# Altium PCB Arduino_DIY.PcbDoc
Units mm, origin at the board's own origin, x right, y up, seen from the top; angles counter-clockwise.
Board outline 80 x 47.5 mm, 2 copper layers (Top Layer, Bottom Layer), stack 1.1 mm thick; 35 components, 34 nets, 157 pads, 2 vias.
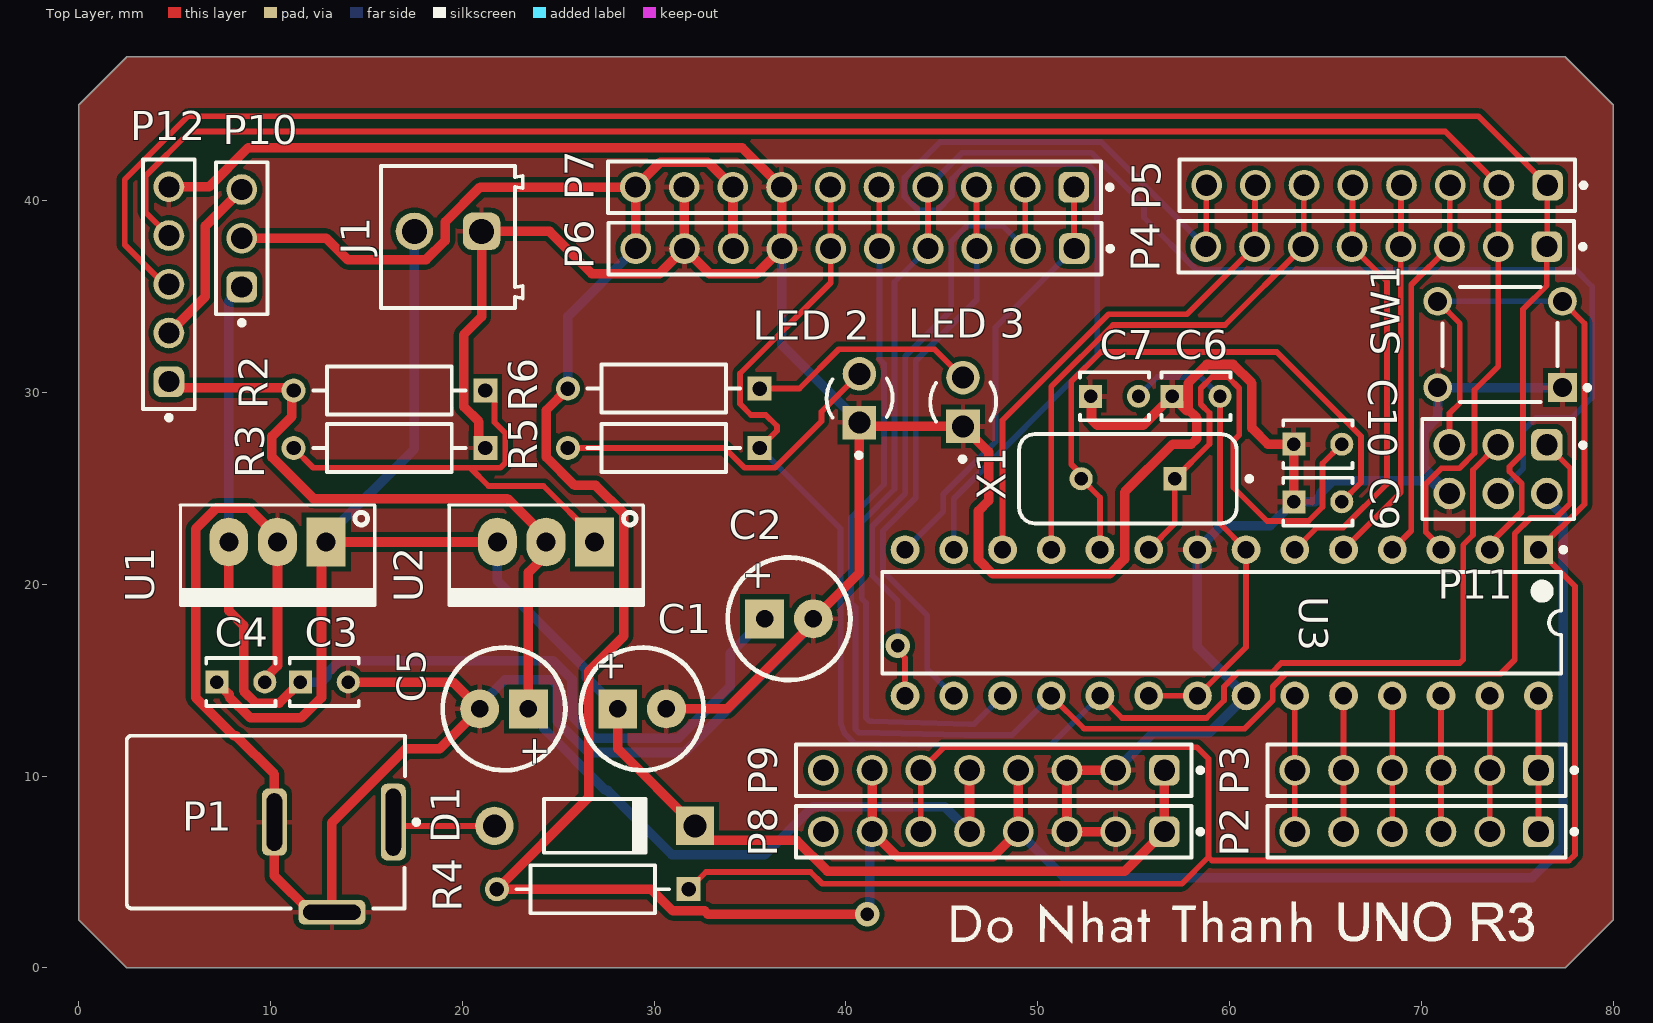
[diagram p0: Top Layer view]
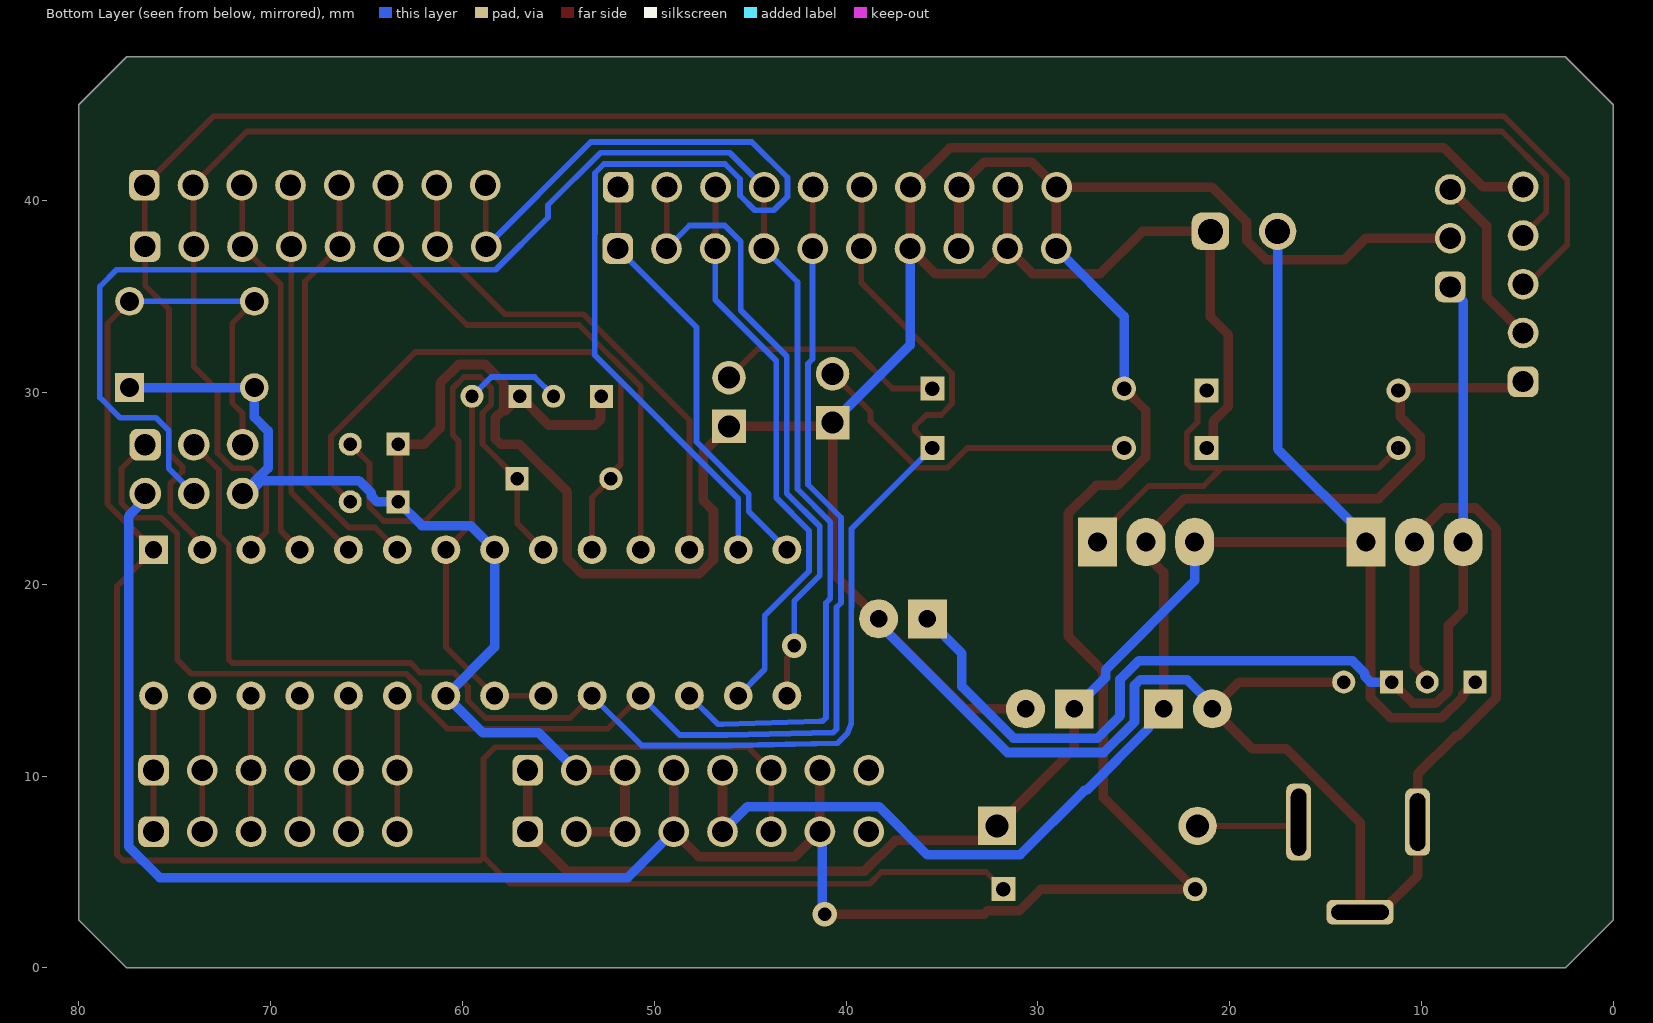
[diagram p1: Bottom Layer view, seen from below]
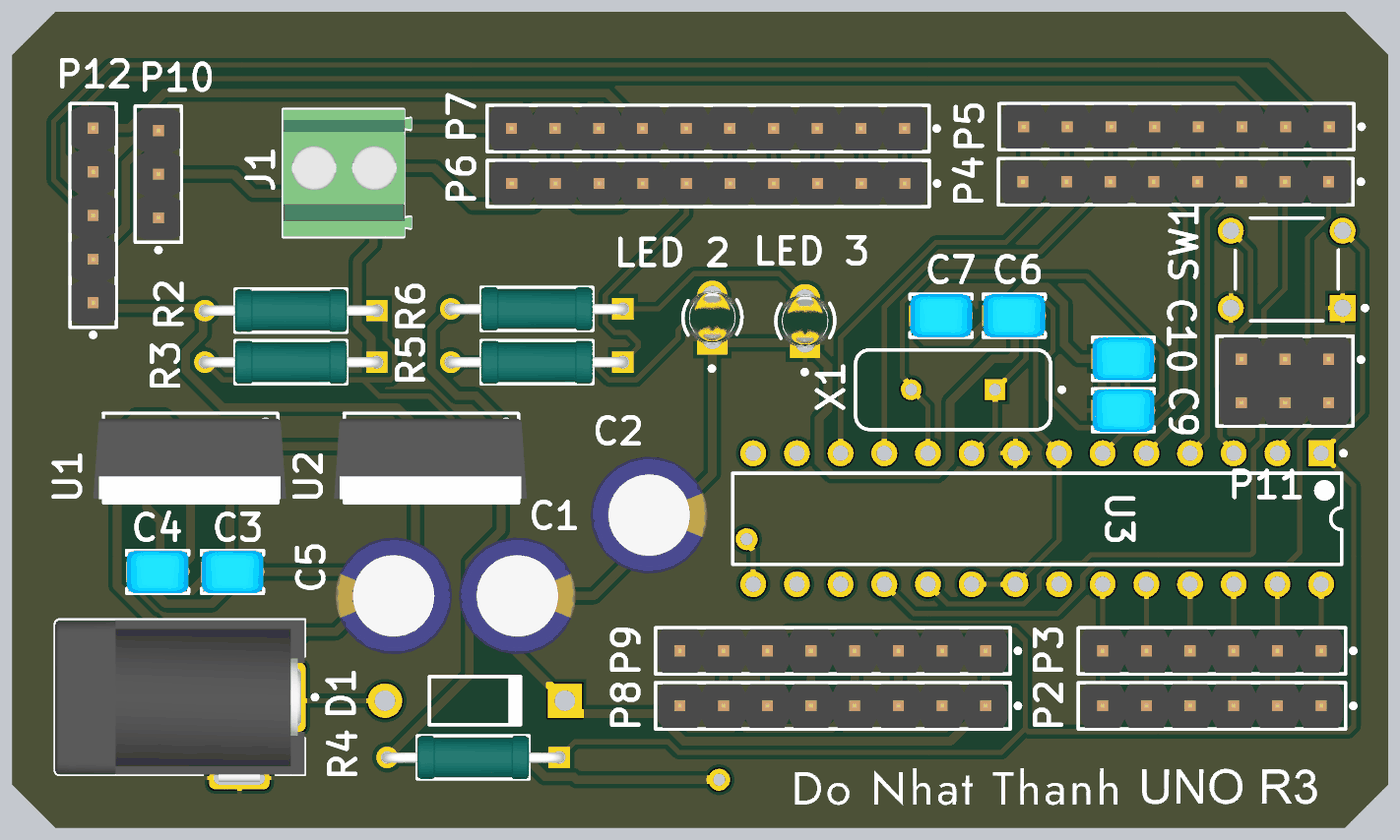
[diagram p2: 3D render of the assembled board from above, using the file's embedded part models]

## Layer stack, top to bottom
Top Solder: solder mask 0.05, Solder Resist, Dk 3.5
Top Layer: signal copper 0.1
Dielectric 1: dielectric 0.9, FR-4, Dk 4.8
Bottom Layer: signal copper 0.1
Bottom Solder: solder mask 0.05, Solder Resist, Dk 3.5

## Board outline
0,45 0,2.5 2.5,0 77.5,0 80,2.5 80,45 77.5,47.5 2.5,47.5

## Design rules (kind name [scope] priority, off if disabled: settings)
Clearance [All] p1: gap=0.254 ignorepadtopadclearanceinfootprint=FALSE except(0: Arc-Hole Track-Hole SMDPad-Hole THPad-Hole Via-Hole Fill-Hole Poly-Hole Region-Hole Text-Hole)
HoleSize [All] p1: absolutevalues=TRUE maxlimit=3.5 minlimit=0.025 maxpercent=80.000 minpercent=20.000
PolygonConnect [All] p1: connectstyle=Relief reliefconductorwidth=0.254 reliefentries=4 polygonreliefangle="90 Angle" airgapwidth=0.254
RoomDefinition Arduino_DIY [InComponentClass('Arduino_DIY')] p1: confinementstyle=ConfineOut formatcopy=TRUE lockcomponents=FALSE outline -71.7,134.3 162.869,134.3 162.869,173.162 -71.7,173.162
RoutingVias [All] p1: holewidth=0.711 width=1.27 viastyle="Through Hole" minholewidth=0.711 minwidth=1.27 maxholewidth=0.711 maxwidth=1.27
SolderMaskExpansion [All] p1: expansion=0.102 istentingtop=FALSE
Width I/O [All] p1: maxlimit=0.5 minlimit=0.254 preferedwidth=0.3
29 further rules are at their usual default settings.

## Components (designator, comment, footprint, x,y, rotation, side; value= is the part's Value field where it differs from the comment)
C1 "100uF" CAP_D6.3 28.1,13.5 r0 top
C2 "100uF" CAP_D6.3 35.76,18.2 r0 top
C3 "100nF" FP-RCE0DB-MFG 12.8,14.9 r0 top
C4 "100nF" FP-RCE0DB-MFG 8.45,14.9 r0 top
C5 "100uF" CAP_D6.3 23.44,13.5 r180 top
C6 "100nF" FP-RCE0DB-MFG 58.25,29.8 r0 top
C7 "100nF" FP-RCE0DB-MFG 54,29.8 r0 top
C9 "22pF" FP-RCE0DB-MFG 64.6,24.3 r0 top
C10 "22pF" FP-RCE0DB-MFG 64.6,27.3 r0 top
D1 "Diode 1N4007" DO-41 26.9,7.4 r0 top
J1 "Terminal Con" 691214110002 19.25,38.1 r180 top
"LED 2" "3mm" FP-HLMP-1503-MFG 40.7,29.7 r90 top
"LED 3" "3mm" FP-HLMP-1503-MFG 46.1,29.5 r90 top
P1 "Jack DC" KYCN-KLDX-0202-A_V 10.2,7.6 r180 top
P2 "Header 6" 61300611121 69.75,7.1 r180 top
P3 "Header 6" 61300611121 69.75,10.3 r180 top
P4 "61300811121" 61300811121 67.65,37.6 r180 top
P5 "61300811121" 61300811121 67.69,40.8 r180 top
P6 "Header 10" 61301011121 40.47,37.5 r180 top
P7 "Header 10" 61301011121 40.45,40.7 r180 top
P8 "61300811121" 61300811121 47.71,7.1 r180 top
P9 "61300811121" 61300811121 47.71,10.3 r180 top
P10 "61300311121" 61300311121 8.5,38.04 r90 top
P11 "61300621121" 61300621121 74,26 r180 top
P12 "61300511121" 61300511121 4.7,35.64 r90 top
R2 "290E" FP-MRS25-MFG 16.2,30.1 r180 top
R3 "390E" FP-MRS25-MFG 16.2,27.1 r180 top
R4 "10K" FP-MRS25-MFG 26.8,4.1 r180 top
R5 "330E" FP-MRS25-MFG 30.5,27.1 r180 top
R6 "330E" FP-MRS25-MFG 30.5,30.2 r180 top
SW1 "Button" TECO-1825910-6_V 74.1,32.5 r180 top
U1 "LM7805" QTO-220 12.9,22.2 r180 top
U2 "LM317" QTO-220 26.9,22.2 r180 top
U3 "ATmega328P-PU" 28P3 59.59,17.99 r270 top
X1 "16MHz" FOX-FOXSLF080-20 54.7,25.5 r180 top

## Footprints (in the part's own frame and the unit in brackets; to place one, negate y for a bottom-side part, rotate by r counter-clockwise, add the part's x,y. Pads: shape width x height; smd on the part's side, far side on the other; paste and mask are expansions set on the pad)
28P3 [mm] "28-Pin Plastic Dual In-Line Package (PDIP)"
  rect 1.5x1.5 hole 0.9: 1(-3.81,16.51)
  round 1.5 hole 0.9: 2(-3.81,13.97) 3(-3.81,11.43) 4(-3.81,8.89) 5(-3.81,6.35) 6(-3.81,3.81) 7(-3.81,1.27) 8(-3.81,-1.27) 9(-3.81,-3.81) 10(-3.81,-6.35) 11(-3.81,-8.89) 12(-3.81,-11.43) 13(-3.81,-13.97) 14(-3.81,-16.51) 15(3.81,-16.51) 16(3.81,-13.97) 17(3.81,-11.43) 18(3.81,-8.89) 19(3.81,-6.35) 20(3.81,-3.81) 21(3.81,-1.27) 22(3.81,1.27) 23(3.81,3.81) 24(3.81,6.35) 25(3.81,8.89) 26(3.81,11.43) 27(3.81,13.97) 28(3.81,16.51)
  silkscreen extent -3.93,-17.7 2.65,17.94, body extent -3.6,-17.65 3.6,17.65, height 4.58
61300311121 [mm] "Pin Header, pitch 2.54 mm, THT, Vertical, single row, 3p"
  rrect50% 1.6x1.6 hole 1.1: 1(-2.54,0)
  round 1.6 hole 1.1: 2(0,0) 3(2.54,0)
  silkscreen extent -4.53,-1.35 3.96,1.35, body extent -3.81,-1.27 3.81,1.27, height 8.57
61300511121 [mm] "Pin Header, pitch 2.54 mm, THT, Vertical, single row, 5p"
  rrect50% 1.6x1.6 hole 1.1: 1(-5.08,0)
  round 1.6 hole 1.1: 2(-2.54,0) 3(0,0) 4(2.54,0) 5(5.08,0)
  silkscreen extent -7.07,-1.35 6.5,1.35, body extent -6.35,-1.27 6.35,1.27, height 8.57
61300611121 [mm] "Pin Header, pitch 2.54 mm, THT, Vertical, single row, 6p"
  rrect50% 1.6x1.6 hole 1.1: 1(-6.35,0)
  round 1.6 hole 1.1: 2(-3.81,0) 3(-1.27,0) 4(1.27,0) 5(3.81,0) 6(6.35,0)
  silkscreen extent -8.34,-1.35 7.77,1.35, body extent -7.62,-1.27 7.62,1.27, height 8.57
61300621121 [mm] "Pin Header, pitch 2.54 mm, THT, Vertical, dual row, 6p"
  rrect50% 1.65x1.65 hole 1.1: 1(-2.54,-1.27)
  round 1.65 hole 1.1: 2(-2.54,1.27) 3(0,-1.27) 4(0,1.27) 5(2.54,-1.27) 6(2.54,1.27)
  silkscreen extent -4.54,-2.62 3.96,2.62, body extent -3.81,-2.54 3.81,2.54, height 8.59
61300811121 [mm] "Pin Header, pitch 2.54 mm, THT, Vertical, single row, 8p"
  rrect50% 1.6x1.6 hole 1.1: 1(-8.89,0)
  round 1.6 hole 1.1: 2(-6.35,0) 3(-3.81,0) 4(-1.27,0) 5(1.27,0) 6(3.81,0) 7(6.35,0) 8(8.89,0)
  silkscreen extent -10.88,-1.35 10.31,1.35, body extent -10.16,-1.27 10.16,1.27, height 8.57
61301011121 [mm] "Pin Header, pitch 2.54 mm, THT, Vertical, single row, 10p"
  rrect50% 1.6x1.6 hole 1.1: 1(-11.43,0)
  round 1.6 hole 1.1: 2(-8.89,0) 3(-6.35,0) 4(-3.81,0) 5(-1.27,0) 6(1.27,0) 7(3.81,0) 8(6.35,0) 9(8.89,0) 10(11.43,0)
  silkscreen extent -13.42,-1.35 12.85,1.35, body extent -12.7,-1.27 12.7,1.27, height 8.57
691214110002 [mm] "3.50 mm Horizontal Entry Modular, 2p"
  rrect50% 1.95x1.95 hole 1.3: 1(-1.75,-0.3)
  round 1.95 hole 1.3: 2(1.75,-0.3)
  silkscreen extent -3.9,-3.7 3.5,3.7, body extent -3.95,-3.7 3.5,3.7, height 8.55
CAP_D6.3 [mil]
  rect 80x80 hole 36: 1(0,0)
  round 80 hole 36: 2(100,0)
  silkscreen extent -76,-126 176,126, body extent -84,-134 184,134, height 492
DO-41 [mm] "Diode, Axial; Body 5.2 x 2.7 mm (LxDia. max), Lead Dia. 0.86 mm (max)"
  round 2 hole 1.2: 1(-5.23,0)
  rect 2x2 hole 1.2: 2(5.23,0)
  silkscreen extent -2.65,-1.4 2.75,1.4
FOX-FOXSLF080-20 [mm] "THD, 2-Leads, Body 11.35x4.65mm"
  rect 1.2x1.2 hole 0.7: 1(-2.44,0)
  round 1.2 hole 0.7: 2(2.44,0)
  silkscreen extent -6.45,-2.32 5.68,2.32, body extent -5.67,-2.32 5.68,2.33, height 3.6
FP-HLMP-1503-MFG [mm]
  rect 1.75x1.75 hole 1.15 paste-1000 mask+0: 1(-1.27,0)
  round 1.75 hole 1.15 paste-1000 mask+0: 2(1.27,0)
  silkscreen extent -3.1,-1.73 1.02,1.71, body extent -2.42,-2.42 2.42,2.42, height 0.25
FP-MRS25-MFG [mm]
  rect 1.25x1.25 hole 0.75 paste-1000 mask+0: 1(-5,0)
  round 1.25 hole 0.75 paste-1000 mask+0: 2(5,0)
  silkscreen extent -3.98,-1.25 3.98,1.25, body extent -5.72,-1.35 5.72,1.35, height 0.25
FP-RCE0DB-MFG [mm]
  rect 1.2x1.2 hole 0.7 paste-1000 mask+0: 1(-1.25,0)
  round 1.2 hole 0.7 paste-1000 mask+0: 2(1.25,0)
  silkscreen extent -1.8,-1.25 1.8,1.25, body extent -1.95,-1.35 1.95,1.35, height 0.25
KYCN-KLDX-0202-A_V [mm] "Power Jack, 3-Leads, Body 14.5x9mm"
  rrect50% 1.3x4 hole 0.8 slot 3.5 at 90 deg: 1(-6.2,0)
  rrect50% 1.3x3.5 hole 0.8 slot 3 at 90 deg: 2(0,0)
  rrect50% 3.5x1.3 hole 0.8 slot 3 at 0 deg: 3(-3,4.7)
  silkscreen extent -7.53,-4.5 7.7,4.5, body extent -6.8,-4.5 7.7,4.9, height 10.8
QTO-220 [mil] "TO-220 - 1-2-3"
  rect 80x100 hole 39: 1(0,0)
  oval 80x100 hole 39: 2(100,0) 3(200,0)
  silkscreen extent -100,-76 300,130, body extent -119,-64 322,121, height 755
TECO-1825910-6_V [mm] "Switch, 4-Leads, Body 5.99x5.99mm"
  rect 1.5x1.5 hole 0.99: 1(-3.25,2.25)
  round 1.5 hole 0.99: 2(3.25,2.25) 3(-3.25,-2.25) 4(3.25,-2.25)
  silkscreen extent -4.68,-2.99 2.99,3, body extent -3,-2.99 2.99,3, height 5

## Part data
C1 C2 C5: library part "Cap Pol 6mm", "Polarized Capacitor (Axial)", LatestRevisionDate=17-Jul-2002, LatestRevisionNote="Re-released for DXP Platform.", PackageReference=POLAR0.8, Published=8-Jun-2000, Publisher="Altium Limited"
C3 C4 C6 C7 C9 C10: library part CMP-06035-020630-1, "Cap Ceramic 220pF 50V C0G ±5% Radial 2.5mm +125°C Ammo Pack", Capacitance=220pF, Case/Package=Radial, Dielectric=C0G, Max Operating Temperature=125°C, Min Operating Temperature=-55°C, Package Quantity=2000, Ratings=AEC-Q200, Resistor Type=Ceramic, Tolerance=5%, Voltage=50V, Depth=3.5mm, Diameter=3.6mm, Height=3.5mm, Height - Seated (Max)=0.138inch, Lead Diameter=0.5mm, Lead Pitch=0.098inch, Lead/Base Style=Straight, Length=3.6mm, Mount="Through Hole", Packaging="Tape and Reel", Termination=Radial, Voltage Rating=50V, Voltage Rating (DC)=50V, Width=0.098inch
D1: "1 Amp General Purpose Rectifier", Code_JEDEC=DO-204-AL, ComponentLink1Description="Manufacturer Link", ComponentLink1URL=http://www.fairchildsemi.com/, ComponentLink2Description=Datasheet, ComponentLink2URL=http://www.fairchildsemi.com/ds/1N%2F1N4001.pdf, DatasheetVersion=1998, LatestRevisionDate=17-Jul-2002, LatestRevisionNote="Re-released for DXP Platform.", PackageDescription="Diode, Axial; Body 5.2 x 2.7 mm (LxDia. max), Lead Dia. 0.86 mm (max)", PackageReference=DO-41, PackageVersion=Aug-1999, Published=8-Jun-2000, Publisher="Altium Limited"
J1: library part CMP-1502-02464-2, Color="Blue, Green", Current=10A, Max Operating Temperature=105°C, Min Operating Temperature=-40°C, Voltage=300V, Contact Material=Brass, Contact Plating="Brass, Tin", Current Rating=10A, Height=8.7mm, Housing Material=Nylon, Lead Pitch=3.5mm, Length=7.4mm, Mount="Through Hole", NexarPartId=18818288, Number of Contacts=2, Number of Levels=1, Number of Pins=2, Number of Positions Per Level=2, Number of Rows=1, Packaging=Box, Pitch=3.5052mm, Plating="Brass, Steel", REACH SVHC=Unknown, RoHS=Compliant, Stripping Length=-6mm, Termination=Screw, Voltage Rating=300V, Width=7.9mm, Wire Gauge (Max)=24AWG, Wire Gauge (Min)=16AWG, Wire/Cable Gauge=24AWG
"LED 2" "LED 3": library part CMP-18399-000010-1, "LED GREEN DIFFUSED T-1 T/H", Colour=Green, Forward Current=10mA, Forward Voltage=2.1V, Manufacturer=Broadcom, Manufacturer Part Number=HLMP-1503, Max Junction Temp=+110°C, Reverse Voltage=5V, Temperature="-20°C to +100°C", Temperature Range High=+100°C, Temperature Range Low=-20°C, Automotive=No, Category=Diode, ComponentLink2Description=Datasheet, ComponentLink2URL=https://docs.broadcom.com/docs/AV02-1555EN, Device Class L1=Optoelectronics, Device Class L2=LEDs, Device Class L3=unset, Digikey Description="LED GREEN DIFFUSED T-1 T/H", Height=6.35mm, Lead Free=Yes, Led Orientation=Straight, Luminous Intensity=1mcd, Mouser Description="LED; Green; 1mcd; 0.115In.Dia.; T-1; 565nm; 25mA; 2.1V; 5V; GaP; -20degC; 100deg", Octopart=https://octopart.com/hlmp-1503-broadcom-71130371, Package=HLMP-1503, Peak Emmision Wavelength=565nm, RoHS=TRUE, Standoff Height=0.88mm, Viewing Angle=60°, Wavelength=569nm
P1: library part CMP-1673-00001-5, "DC Power Jack, 24 V, 3.5 A, -25 to 85 degC, 3-Pin THD, RoHS", Colour=Black, Current Rating="3.5 A", Manufacturer=Kycon, Max Operating Temperature="85 degC", Min Operating Temperature="-25 degC", Package Quantity=500, Voltage Rating="24 V", ComponentLink1Description="Manufacturer URL", ComponentLink1URL=http://www.kycon.com/, ComponentLink2Description=Datasheet, ComponentLink2URL=http://www.kycon.com/Pub_Eng_Draw/KLDX-0202-X.PDF, Connector Type=Power, Contact Gender=Female, Contact Material=Brass, Contact Plating=Tin, DatasheetVersion="Rev. D3, 06/2013", Height="10.8 mm", Housing Material=PBT, Length="9.2 mm", Mount="Through Hole", Mounting Technology="Through Hole", PackageDescription="3-Pin Through Hole Device, Body 14.5 x 9 mm", PackageReference=KLDX-0202-A, Pins=2, RoHSCompliant=true
P2 P3: library part CMP-1502-01070-3, Color=Black, Contact Resistance=20mΩ, Current Rating=3A, Max Operating Temperature=105°C, Min Operating Temperature=-40°C, Operating Supply Voltage=250V, Connector Type="Male Pin", Contact Gender=Male, Contact Material=Copper, Contact Mating Length=5.9944mm, Contact Plating=Gold, Gender=Male, Height=8.89mm, Housing Material=PBT, Lead Free="Lead Free", Lead Pitch=2.54mm, Mount="Through Hole", NexarPartId=20084590, Number of Contacts=6, Number of Pins=6, Number of Positions=6, Number of Rows=1, Orientation=Vertical, Packaging=Bulk, Pitch=2.54mm, REACH SVHC=Unknown, RoHS=Compliant, Termination="Through Hole", Voltage Rating=250V
P4 P5 P8 P9: library part CMP-1502-01076-3, Color=Black, Contact Resistance=20mΩ, Current Rating=3A, Max Operating Temperature=105°C, Min Operating Temperature=-40°C, Operating Supply Voltage=250V, Connector Type="Male Pin", Contact Material=Copper, Contact Mating Length=5.9944mm, Contact Plating=Gold, Gender=Male, Height=8.54mm, Lead Pitch=2.54mm, Mount="Through Hole", NexarPartId=32855533, Number of Contacts=8, Number of Pins=8, Number of Positions=8, Number of Rows=1, Orientation=Vertical, Packaging=Bulk, Pitch=2.54mm, REACH SVHC=Unknown, RoHS=Compliant, Termination=Solder, Voltage Rating=250V
P6 P7: library part CMP-1502-01082-5, Color=Black, Contact Resistance=20mΩ, Current Rating=3A, Flammability Rating="UL94 V-0", Insulation Resistance=1GΩ, Max Operating Temperature=105°C, Min Operating Temperature=-40°C, Operating Supply Voltage=250V, Connector Type="Male Pin", Contact Gender=Male, Contact Material=Copper, Contact Mating Length=5.9944mm, Contact Plating=Gold, Gender=Male, Height=8.74mm, Housing Material=PBT, Lead Pitch=2.54mm, Length=2.54mm, Mount="Through Hole", NexarPartId=18818159, Number of Contacts=10, Number of Pins=10, Number of Positions=10, Number of Rows=1, Orientation=Vertical, Packaging=Bulk, Pitch=2.54mm, REACH SVHC=Unknown, RoHS=Compliant, Termination=Solder, Voltage Rating=250V, Width=25.4mm
P10: library part CMP-1502-01062-3, Color=Black, Contact Resistance=20mΩ, Current Rating=3A, Max Operating Temperature=105°C, Min Operating Temperature=-40°C, Operating Supply Voltage=250V, Connector Type="Male Pin", Contact Material=Copper, Contact Mating Length=5.9944mm, Contact Plating=Gold, Gender=Male, Height=8.94mm, Lead Free="Lead Free", Lead Pitch=2.54mm, Mount="Through Hole", NexarPartId=32855521, Number of Contacts=3, Number of Pins=3, Number of Positions=3, Number of Rows=1, Orientation=Vertical, Packaging=Bulk, Pitch=2.54mm, REACH SVHC=Unknown, RoHS=Compliant, Termination=Solder, Voltage Rating=250V
P11: library part CMP-1502-01072-3, Color=Black, Contact Resistance=20mΩ, Current Rating=3A, Max Operating Temperature=105°C, Min Operating Temperature=-40°C, Operating Supply Voltage=250V, Connector Type="Male Pin", Contact Material=Copper, Contact Mating Length=5.9944mm, Contact Plating=Gold, Gender=Male, Height=8.89mm, Lead Pitch=2.54mm, Mount="Through Hole", NexarPartId=32855529, Number of Contacts=6, Number of Pins=6, Number of Positions=6, Number of Rows=2, Orientation=Vertical, Packaging=Bulk, Pitch=2.54mm, REACH SVHC=Unknown, RoHS=Compliant, Row Spacing=2.54mm, Termination=Solder, Voltage Rating=250V
P12: library part CMP-1502-01068-3, Color=Black, Contact Resistance=20mΩ, Current Rating=3A, Max Operating Temperature=105°C, Min Operating Temperature=-40°C, Operating Supply Voltage=250V, Connector Type="Male Pin", Contact Material=Copper, Contact Mating Length=5.9944mm, Contact Plating=Gold, Gender=Male, Height=8.89mm, Lead Free="Lead Free", Lead Pitch=2.54mm, Mount="Through Hole", NexarPartId=32855526, Number of Contacts=5, Number of Pins=5, Number of Positions=5, Number of Rows=1, Orientation=Vertical, Packaging=Bulk, Pitch=2.54mm, REACH SVHC=Unknown, RoHS=Compliant, Termination=Solder, Voltage Rating=250V
R2 R3 R4 R5 R6: library part CMP-02408-000051-1, "RES 1K OHM 0.6W 1% AXIAL", Case/Package=Axial, Max Operating Temperature=155°C, Max Power Dissipation=600mW, Min Operating Temperature=-55°C, Package Quantity=5000, Resistance=1kR, Resistance Tolerance=1%, Resistor Type="Metal Film", Temperature Coefficient=50ppm/°C, Voltage Rating=350V, Construction=Cylindrical, Contact Plating=Tin, Diameter=2.5mm, Lead Diameter=0.6mm, Lead Free="Lead Free", Length=6.5mm, Military Standard=Not, Mount="Through Hole", Number of Pins=2, Number of Terminations=2, Packaging="Tape and Reel", Power Rating=600mW, Radiation Hardening=No, RoHS Compliant=Yes, Series=MRS25, Technology="THIN FILM", Termination=Axial, Tolerance=1%, Voltage Rating (DC)=350V, Weight=0.00776oz, Width=2.5mm
SW1: library part CMP-1684-00021-1, "Tact Switch, SPST-NO, 0.05 A, -35 to 85 degC, 4-Pin THD, RoHS, Bulk", Actuator Color=Black, Contact Rating @ Voltage=0.05A@24VDC, Dielectric Strength=500VAC, Manufacturer="TE Connectivity", Maximum AC Voltage Rating=N/A, Maximum Contact Resistance=100mOhm, Maximum DC Voltage Rating=24V, Minimum Insulation Resistance=100MOhm, Operating Temperature=-35to85C, Package Description="4-Pin Through Hole Device, Body 5.99 x 5.99 mm, Pitch 6.5 mm", Package Reference=THD, Part No=1825910-6, Actuator Length=1.4mm, Actuator Material=PolybutyleneTerephthalate, Actuator Style=RoundButton, Base Material=N/A, Body Orientation=Straight, Bushing Type=Unthreaded, Contact Material=CopperAlloy, Contact Plating=Silver, Datasheet URL=http://www.te.com/commerce/DocumentDelivery/DDEController?Action=showdoc&DocId=Customer+Drawing%7F1825910%7FC9%7Fpdf%7FEnglish%7FENG_CD_1825910_C9.pdf%7F1825910-6, Datasheet Version="Rev. C9", Dimension=5.99x5mm, Electrical Life=100000Cycles, Family=1825910, Function=MomentaryContact, Housing Material=N/A, Illumination=N/R, Manufacturer URL=http://www.te.com, Mechanical Life=100000Cycles, Mounting=ThroughHole, Packaging=N/A, Pole Throw Configuration=SPST, Product Weight=N/A, RoHS=Yes, Seal Description=N/A, Seal Location=N/A, Switch Configuration=OFF(ON), Terminal Type=PCPins, Thread Size=N/R
U1: library part LM78xx, "On ap +, from + 5 to + 24VDC"
U2: "Adj Voltage +1.2 -> +37V"
U3: library part CMP-0095-00013-2, "8-bit AVR Microcontroller, 32KB Flash, 1KB EEPROM, 2KB SRAM, 28-pin PDIP, Industrial Grade (-40°C to 85°C)", ComponentLink1Description="Manufacturer URL", ComponentLink1URL=http://www.atmel.com/, ComponentLink2Description="ATmega48A/48PA/88A/88PA/168A/168PA/328/328P Datasheet", ComponentLink2URL=http://www.atmel.com/dyn/resources/prod_documents/8271.pdf, ComponentLink3Description="ATmega48A/48PA/88A/88PA/168A/168PA/328/328P Summary", ComponentLink3URL=http://www.atmel.com/dyn/resources/prod_documents/8271S.pdf, DatasheetVersion="revD, May-2011", PackageDescription="28-lead (0.300\"/7.62mm Wide) Plastic Dual Inline Package (PDIP)", PackageReference=28P3, PackageVersion="revB, Sep-2001", RevisionNote="DatasheetVersion updated. URLs added."
X1: library part CMP-1749-00002-1, "Resistance Weld Thru-Hole Crystal, 8 MHz, -20 to 70 degC, 2-Pin THD, RoHS, Bulk", Case\Package=TO-263-3, Dropout Voltage="2 V", Max Input Voltage="35 V", Max Operating Temperature="125 degC", Max Ouput Current="1 A", Min Input Voltage="7 V", Min Operating Temperature="0 degC", Nominal Output Voltage="5 V", Package Quantity=50, ComponentLink1Description="Manufacturer URL", ComponentLink1URL=http://www.foxonline.com/, ComponentLink2Description=Datasheet, ComponentLink2URL=http://download.siliconexpert.com/pdfs/2015/4/5/6/5/7/200/fox_/manual/35607121449963728hc49slf.pdf, DatasheetVersion=Mar-15, Height="30.02 mm", Length="10.24 mm", Mount="Surface Mount", Output Current="1 A", Output Voltage="5 V", Outputs=1, PackageDescription="2-Pin Through Hole Device, Body 11.35 x 4.65 mm", PackageReference=FOXSLF080-20, Packaging=Rail/Tube, Pins=3, Radiation Hardening=No, REACH SVHC="No SVHC", RoHSCompliant=true, Width="9.35 mm"

## Via types
v1: diameter 1.27, hole 0.711, Top Layer to Bottom Layer, 2 vias

## Nets (pads, with @x,y where several pads share a name; then routed paths per layer and width w, separated by ;. In a path a pad name is that pad's centre, name@x,y a point inside that pad or via, vN(x,y) a via of type N, cw(c..) or ccw(c..) an arc to the next point about the centre after c; other vN are vias at no path point)
3V3: C5.1 P8.5 P9.5 P12.1 R2.2 U2.2 | length 67
  Top Layer w0.5: P12.1 5.016,30.244 11.056,30.244 R2.2 11.096,29.996 11.096,28.725 10.071,27.7 10.071,26.632 12.238,24.465 22.349,24.465 24.36,22.454 U2.2 24.36,21.531 23.44,20.611 C5.1 ; P8.5 P9.5
  Bottom Layer w0.5: C5.1 24.206,12.734 24.206,12.517 27.469,9.254 27.564,9.254 30.921,5.896 35.772,5.896 38.28,8.404 45.136,8.404 P8.5
5V: C2.1 C3.1 P10.1 U1.3 | length 56.5
  Top Layer w0.5: U1.3 7.82,18.63 8.596,17.854 8.596,14.443 9.243,13.796 10.446,13.796 C3.1
  Bottom Layer w0.5: U1.3 7.82,34.739 8.5,35.419 P10.1 ; C3.1 12.653,14.9 12.946,15.193 12.946,15.357 13.593,16.004 24.747,16.004 25.714,15.037 25.714,13.141 26.875,11.98 31.27,11.98 33.956,14.666 33.956,16.396 C2.1
"5V USB": P10.3 P12.2 | length 9.1
  Top Layer w0.5: P12.2 6.6,35 6.6,38.68 P10.3
A0: P2.6 P3.6 U3.23 | length 7.1
  Top Layer w0.3: P2.6 P3.6 U3.23
A1: P2.5 P3.5 U3.24 | length 7.1
  Top Layer w0.3: P2.5 P3.5 U3.24
A2: P2.4 P3.4 U3.25 | length 7.1
  Top Layer w0.3: P2.4 P3.4 U3.25
A3: P2.3 P3.3 U3.26 | length 7.1
  Top Layer w0.3: P2.3 P3.3 U3.26
A4: P2.2 P3.2 U3.27 | length 7.1
  Top Layer w0.3: P2.2 P3.2 U3.27
A5: P2.1 P3.1 U3.28 | length 7.1
  Top Layer w0.3: P2.1 P3.1 U3.28
D2: P4.3 P5.3 U3.4 | length 20.3
  Top Layer w0.3: U3.4 69.474,22.794 69.474,35.614 P4.3 71.48,37.62 71.48,40.78 P5.3
D3: P4.4 P5.4 U3.5 | length 20.3
  Top Layer w0.3: U3.5 68.92,24.78 P4.4 68.94,37.62 68.94,40.78 P5.4
D4: P4.5 P5.5 U3.6 | length 22.6
  Top Layer w0.3: U3.6 63.405,21.8 64.559,22.954 65.924,22.954 68.2,25.23 68.2,35.78 P4.5 66.4,37.62 66.4,40.78 P5.5
D5: P4.6 P5.6 U3.11 | length 27.9
  Top Layer w0.3: U3.11 50.7,30.305 53.915,33.52 59.76,33.52 P4.6 63.86,37.62 63.86,40.78 P5.6
D6: P4.7 P5.7 U3.12 | length 26.9
  Top Layer w0.3: U3.12 48.16,28.548 53.686,34.074 57.774,34.074 P4.7 61.32,37.62 61.32,40.78 P5.7
D7: P4.8 P5.8 U3.13 | length 57.7
  Top Layer w0.3: P4.8 58.78,37.62 58.78,40.78 P5.8
  Bottom Layer w0.3: U3.13 45.62,24.46 53.104,31.944 53.104,38.233 53.084,38.253 53.084,41.433 52.613,41.904 46.301,41.904 45.53,41.133 45.53,40.267 44.759,39.496 43.761,39.496 43.056,40.201 43.056,41.199 44.911,43.054 53.306,43.054 P4.8
D8: P6.1 P7.1 U3.14 | length 22.6
  Top Layer w0.3: P7.1 51.89,40.69 51.89,37.51 P6.1
  Bottom Layer w0.3: U3.14 45.066,23.786 45.066,24.689 47.8,27.423 47.8,33.4 P6.1
D9: P6.2 P7.2 U3.15 | length 34
  Top Layer w0.3: v1(42.7,16.8) 42.7,16.538 43.08,16.158 U3.15 ; P7.2 49.35,40.69 49.35,37.51 P6.2
  Bottom Layer w0.3: v1(42.7,16.8) 42.7,19.121 41.372,20.449 41.372,23.021 43.087,24.736 43.087,31.885 45.484,34.282 45.484,37.867 46.321,38.704 48.156,38.704 P6.2
D10: P6.3 P7.3 U3.16 | length 30.1
  Top Layer w0.3: P7.3 46.81,40.69 46.81,37.51 P6.3
  Bottom Layer w0.3: U3.16 44.234,15.566 44.234,18.37 41.926,20.678 41.926,22.791 43.641,24.506 43.641,31.655 46.82,34.834 P6.3
D11: P6.4 P7.4 P11.4 U3.17 | length 89.6
  Top Layer w0.3: P7.4 44.27,40.69 44.27,37.51 P6.4
  Bottom Layer w0.3: P7.4 46.06,42.5 52.801,42.5 55.531,39.77 55.531,39.126 58.261,36.396 78.028,36.396 78.9,35.524 78.9,29.729 77.848,28.677 75.967,28.677 75.311,28.021 75.311,26.041 P11.4 ; P6.4 42.533,35.753 42.533,24.965 40.818,23.25 40.818,19.257 41.046,19.029 41.046,13.042 41.138,12.95 41.222,12.866 41.34,12.862 46.431,12.7 46.68,12.7 U3.17
D12: P6.5 P7.5 P11.1 U3.18 | length 80.8
  Top Layer w0.3: P7.5 41.73,40.69 41.73,37.51 P6.5 ; U3.18 52.408,12.472 60.784,12.472 62.246,13.934 62.246,14.658 62.922,15.334 74.134,15.334 74.868,16.068 74.868,22.639 75.698,23.469 77.017,23.469 77.769,24.221 77.769,26.041 P11.1
  Bottom Layer w0.3: P6.5 41.74,31.739 41.979,31.5 41.979,25.194 40.264,23.479 40.264,19.028 40.492,18.8 40.492,12.441 40.668,12.265 46.202,12.146 48.666,12.146 U3.18
D13: P6.6 P7.6 P11.3 R5.1 U3.19 | length 81.5
  Top Layer w0.3: R5.1 36.399,27.999 36.399,28.248 35.819,28.828 35.051,28.828 34.471,29.408 34.471,30.992 39.2,35.721 P6.6 39.19,37.51 39.19,40.69 P7.6 ; U3.19 54.394,13.026 58.798,13.026 59.706,13.934 59.706,14.658 60.448,15.4 62.205,15.4 62.693,15.888 71.998,15.888 72.174,16.064 72.174,22.046 72.689,22.561 72.689,25.959 P11.3
  Bottom Layer w0.3: R5.1 39.71,22.89 39.71,18.798 39.72,18.788 39.72,12.808 39.742,12.695 39.938,12.212 40.438,11.711 45.972,11.592 50.652,11.592 U3.19
GND: "LED 2.1" "LED 3.1" C1.2 C2.2 C3.2 C4.2 C5.2 C6.1 C7.1 C9.1 C10.1 J1.1 P1.2 P1.3 P6.7 P6.9 P7.7 P7.9 P8.2 P8.3 P9.2 P9.3 P11.6 P12.5 R3.1 SW1.1 SW1.2 U1.2 U3.8 U3.22 | length 290.5
  Top Layer w0.5: P12.5 6.796,40.72 8.834,42.758 34.582,42.758 P7.7 36.65,40.69 36.65,37.51 P6.7 35.356,36.196 32.884,36.196 P6.9 ; C4.2 9.7,15.089 10.36,15.749 U1.2 10.36,22.454 8.84,23.974 7.19,23.974 6.096,22.88 6.096,14.091 8.092,12.096 8.204,12.096 10.2,10.1 P1.2 10.2,4.8 12.1,2.9 P1.3 13.2,7.572 17.04,11.413 18.813,11.413 C5.2 19.5,14.9 C3.2 ; R3.1 20.862,27.438 20.862,28.475 20.071,29.266 20.071,33.015 21,33.944 J1.1 24.542,38.4 26.746,36.196 30.276,36.196 P6.9 ; C1.2 33.805,13.5 38.3,17.995 C2.2 40.7,20.6 40.7,28.43 40.9,28.23 46.1,28.23 47.432,26.898 47.432,24.352 46.906,23.826 46.906,21.281 47.641,20.546 53.759,20.546 54.526,21.313 54.526,24.799 57.027,27.3 57.999,27.3 58.292,27.593 58.292,28.663 57.842,29.113 57.842,30.487 58.813,31.458 60.187,31.458 61.158,30.487 61.158,28.142 62,27.3 C10.1 C9.1 ; P7.9 31.57,40.69 31.57,37.51 P6.9 ; C7.1 52.8,29.75 52.8,28.593 53.093,28.3 55.5,28.3 C6.1 57.764,29.036 ; P8.2 P8.3 P9.3 P9.2
  Bottom Layer w0.5: C5.2 20.9,13.705 22.215,15.02 24.665,15.02 24.96,14.725 24.96,12.829 26.563,11.226 31.582,11.226 38.3,17.944 C2.2 ; P6.7 36.66,32.47 40.7,28.43 ; P9.2 56.01,12.25 58.93,12.25 U3.22 58.32,16.72 U3.8 59.574,23.054 62.104,23.054 C9.1 64.453,24.3 64.746,24.593 64.746,24.757 65.393,25.404 70.475,25.404 71.149,24.73 P11.6 70.131,26.059 70.131,27.99 70.85,28.709 SW1.2 SW1.1
NetC6_2: C6.2 C7.2 U3.7 U3.20 U3.21 | length 24.9
  Top Layer w0.3: U3.20 U3.21 60.86,16.72 U3.7 59.5,23.16 C6.2
  Bottom Layer w0.3: C7.2 55.25,29.821 56.233,30.804 58.496,30.804 C6.2
NetC9_2: C9.2 U3.10 X1.2 | length 30.8
  Top Layer w0.3: U3.10 53.24,24.52 X1.2 52.26,25.744 51.746,26.258 51.746,30.567 53.291,32.112 62.458,32.112 66.854,27.716 66.854,25.304 C9.2
NetC10_2: C10.2 U3.9 X1.1 | length 27.1
  Top Layer w0.3: U3.9 57.14,23.16 X1.1 58.946,27.306 58.946,28.934 58.496,29.384 58.496,30.216 59.084,30.804 59.916,30.804 60.504,30.216 60.504,27.784 60.202,27.482 60.202,25.05 61.956,23.296 64.117,23.296 64.846,24.025 64.846,26.296 C10.2
NetD1_1: D1.1 P1.1 | length 5.4
  Top Layer w0.3: P1.1 16.6,7.4 D1.1
"NetLED 2_2": "LED 2.2" R5.2 | length 17.9
  Top Layer w0.3: R5.2 33.679,27.1 34.708,26.071 36.292,26.071 38.717,28.496 38.717,28.987 40.7,30.97
"NetLED 3_2": "LED 3.2" R6.1 | length 12.1
  Top Layer w0.3: R6.1 37.578,30.2 39.627,32.249 44.621,32.249 46.1,30.77
NetR2_1: R2.1 R3.2 U2.1 | length 24
  Top Layer w0.3: R3.2 12.229,26.071 20.408,26.071 ; R2.1 21.675,29.625 21.675,28.446 22.229,27.892 22.229,26.308 21.992,26.071 20.408,26.071 ; U2.1 26.9,22.454 24.235,25.119 21.36,25.119 20.408,26.071
Reset: P8.6 P9.6 P11.5 R4.1 SW1.3 SW1.4 U3.1 | length 117.5
  Top Layer w0.3: R4.1 32.699,4.999 38.152,4.999 38.763,4.388 57.512,4.388 58.9,5.776 ; P8.6 P9.6 45.104,11.504 58.296,11.504 58.399,11.401 58.9,10.9 58.9,5.776 ; SW1.4 72.004,33.596 72.004,29.454 71.46,28.91 P11.5 ; SW1.3 78.504,33.596 78.504,24.172 77.247,22.915 77.215,22.915 U3.1 78,19.9 78,5.9 77.7,5.6 59.076,5.6 58.9,5.776
  Bottom Layer w0.3: SW1.4 SW1.3
RX: P4.1 P5.1 P12.3 U3.2 | length 104.4
  Top Layer w0.3: P12.3 4.46,35.64 2.4,37.7 2.4,41.1 5.7,44.4 72.98,44.4 P5.1 76.56,40.78 76.56,37.62 P4.1 76.54,35.572 75.3,34.332 75.3,26.832 74.592,26.124 74.592,25.876 75.229,25.239 75.229,23.784 73.56,22.115 U3.2
TX: P4.2 P5.2 P12.4 U3.3 | length 97.7
  Top Layer w0.3: P12.4 3.496,39.384 3.496,41.296 5.8,43.6 71.24,43.6 P5.2 74.02,40.78 74.02,37.62 P4.2 74,31.349 72.771,30.12 72.771,26.843 71.969,26.041 71.033,26.041 70.231,25.239 70.231,22.708 71.02,21.919 U3.3
VCC: P6.8 P6.10 P7.8 P7.10 P8.4 P8.7 P9.4 P9.7 P10.2 P11.2 R4.2 R6.2 | length 164.3
  Top Layer w0.5: P10.2 12.896,38.04 14.015,36.921 18.113,36.921 19.107,37.916 19.107,38.884 20.923,40.7 P7.10 ; R6.2 24.371,29.071 24.371,26.632 25.848,25.156 26.943,25.156 28.42,23.679 28.42,17.301 26.58,15.461 26.58,8.88 R4.2 29.837,4.1 30.966,2.971 32.634,2.971 32.805,2.8 v1(41.1,2.8) ; P6.10 29.03,37.51 29.03,40.69 P7.10 ; P6.8 34.11,37.51 34.11,40.69 P7.8 32.796,42.004 30.324,42.004 P7.10 ; P9.7 P8.7 42.664,5.796 47.676,5.796 P8.4 P9.4
  Bottom Layer w0.5: R6.2 25.5,33.96 P6.10 ; v1(41.1,2.8) 41.23,2.93 41.23,6.97 P8.7 ; P8.4 51.38,4.7 75.778,4.7 77.404,6.326 77.404,23.555 76.54,24.419 P11.2
Vin: C1.1 C4.1 D1.2 J1.2 P8.1 P9.1 U1.1 U2.3 | length 90.5
  Top Layer w0.5: C4.1 7.842,14.258 7.842,14.13 8.93,13.042 11.605,13.042 12.654,14.091 12.654,21.954 U1.1 U2.3 ; C1.1 28.1,11.43 D1.2 32.88,6.65 37.426,6.65 39.034,5.042 54.542,5.042 P8.1 P9.1
  Bottom Layer w0.5: U1.1 12.9,22.454 17.5,27.054 J1.2 ; U2.3 21.82,20.18 26.468,15.532 26.468,15.132 C1.1
pads on no net: P8.8 P9.8

## Polygon pours and split planes (outlines as drawn)
GND on Top Layer "NONET_L-01_P-001" (solid, remove dead copper, pour order 5): 2.5,47.5 77.5,47.5 80,45 80,2.5 77.5,0 2.5,0 0,2.5 0,45

## Silkscreen, mask and mechanical layers (free items; w line width, h text height)
Top Overlay:
  drawing of 16 lines, arcs and shapes, not listed
Mechanical 1:
  the board outline again, w0.254

## Text inside footprints (layer, text, board x,y; h text height)
C1: Top Overlay "+" at 28.887,14.872 h2.54 r90
C2: Top Overlay "+" at 36.547,19.572 h2.54 r90
C5: Top Overlay "+" at 22.653,12.128 h2.54 r270